# Altium PCB MXCHIP.PcbDoc
Units mm, origin at the board's own origin, x right, y up, seen from the top; angles counter-clockwise.
Board outline 38.8 x 27 mm, 2 copper layers (Top Layer, Bottom Layer); 16 components, 14 nets, 69 pads, 11 vias.
Unrouted connection lines stored in the file: 1.
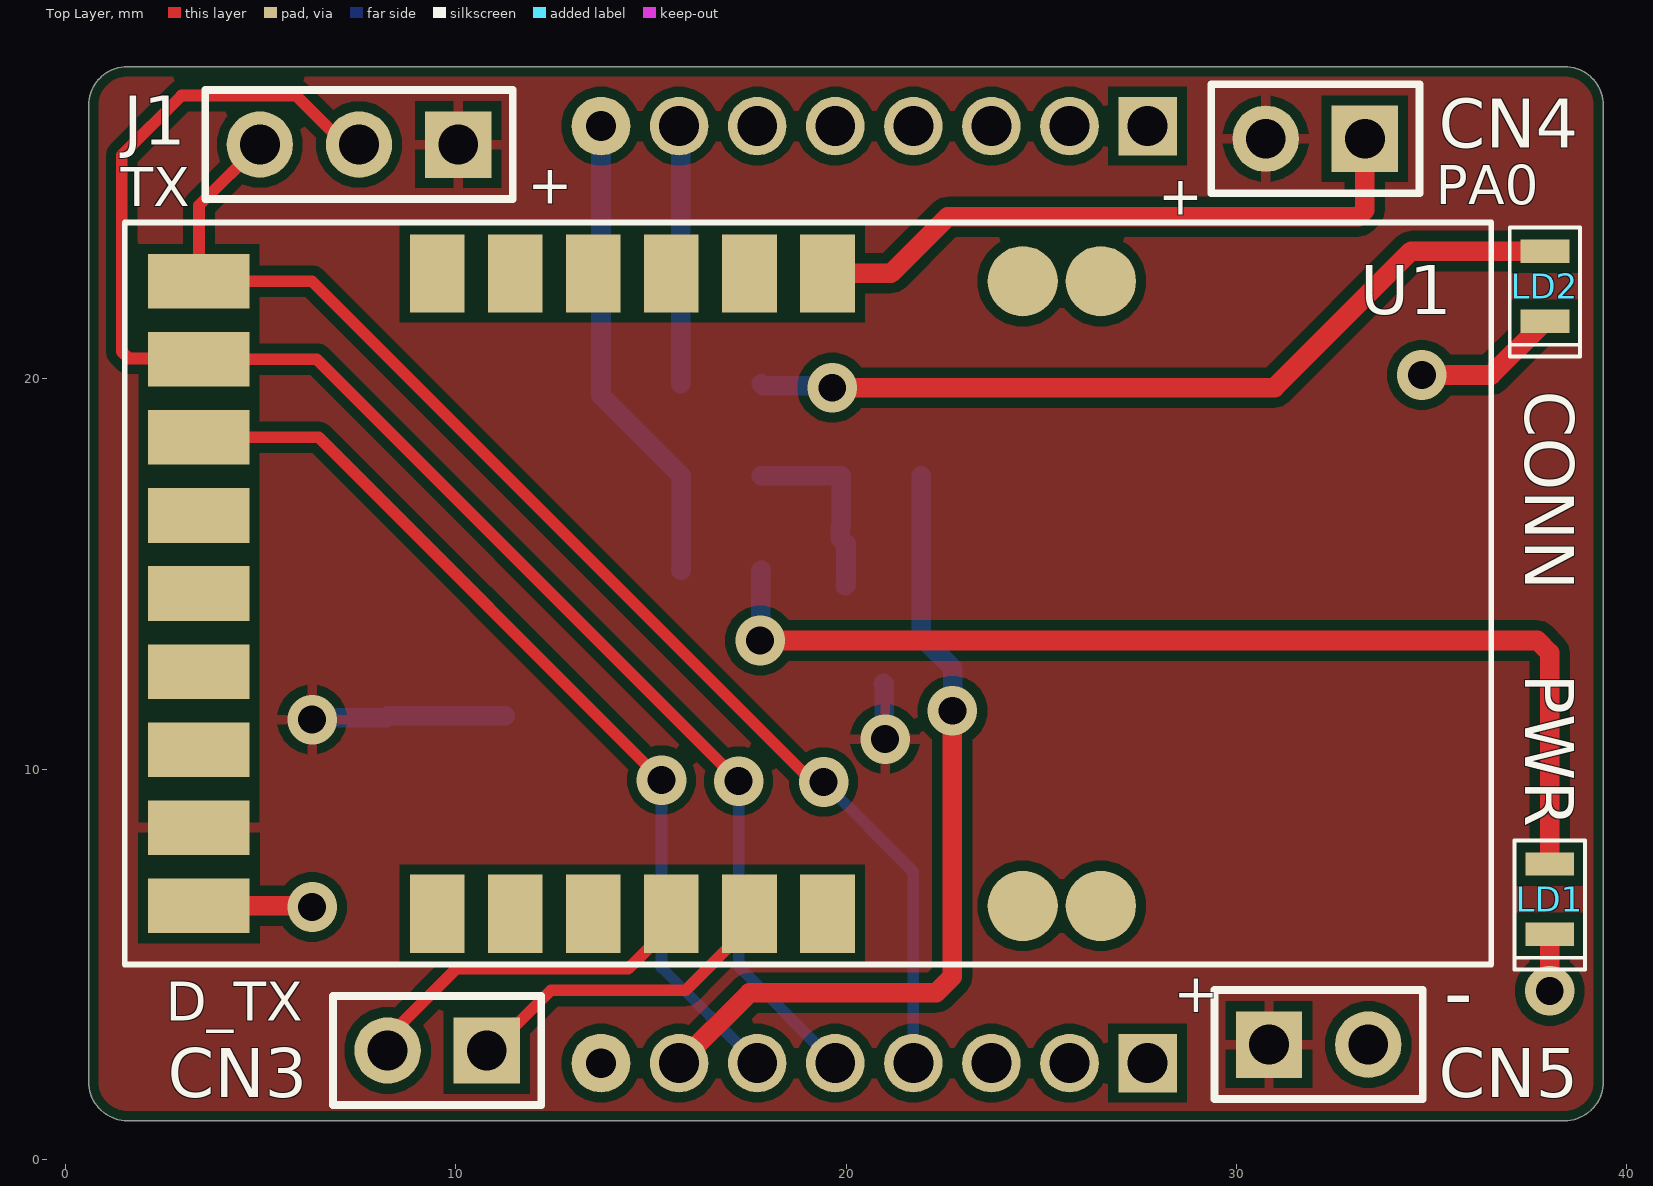
[diagram p0: Top Layer view]
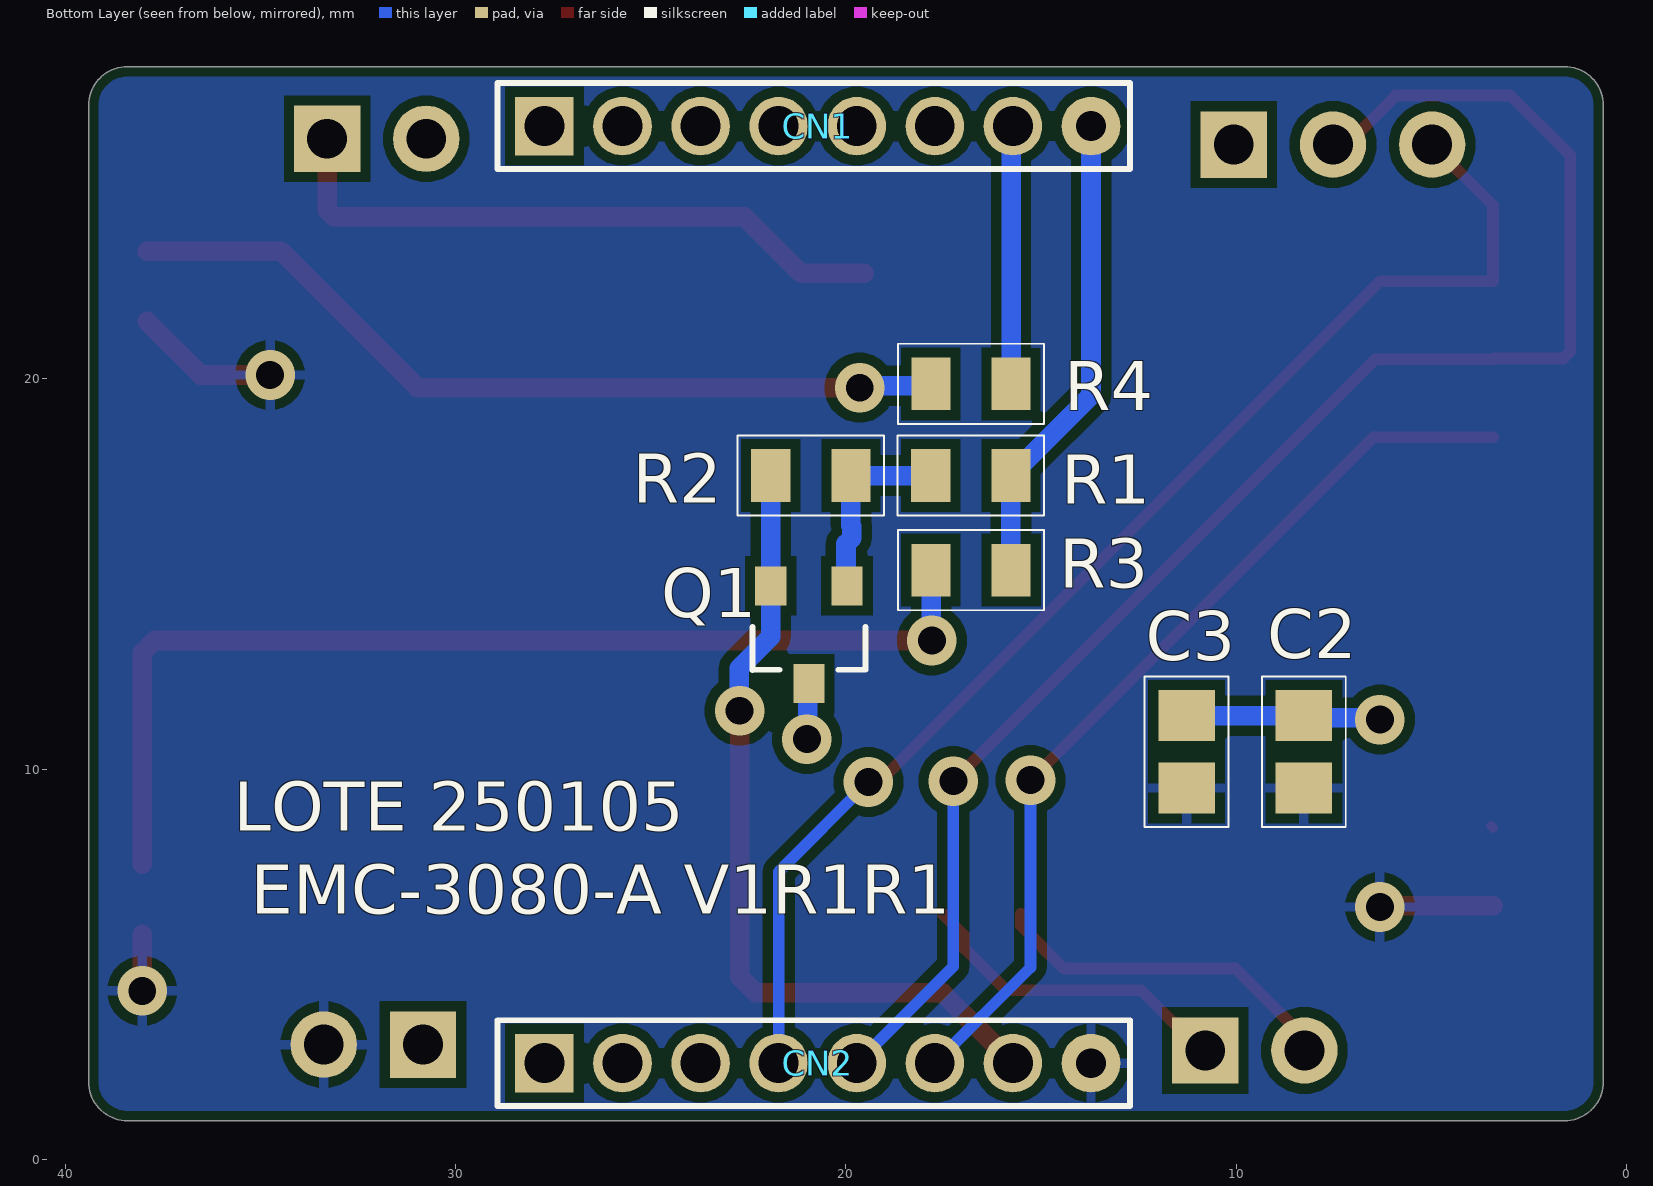
[diagram p1: Bottom Layer view, seen from below]
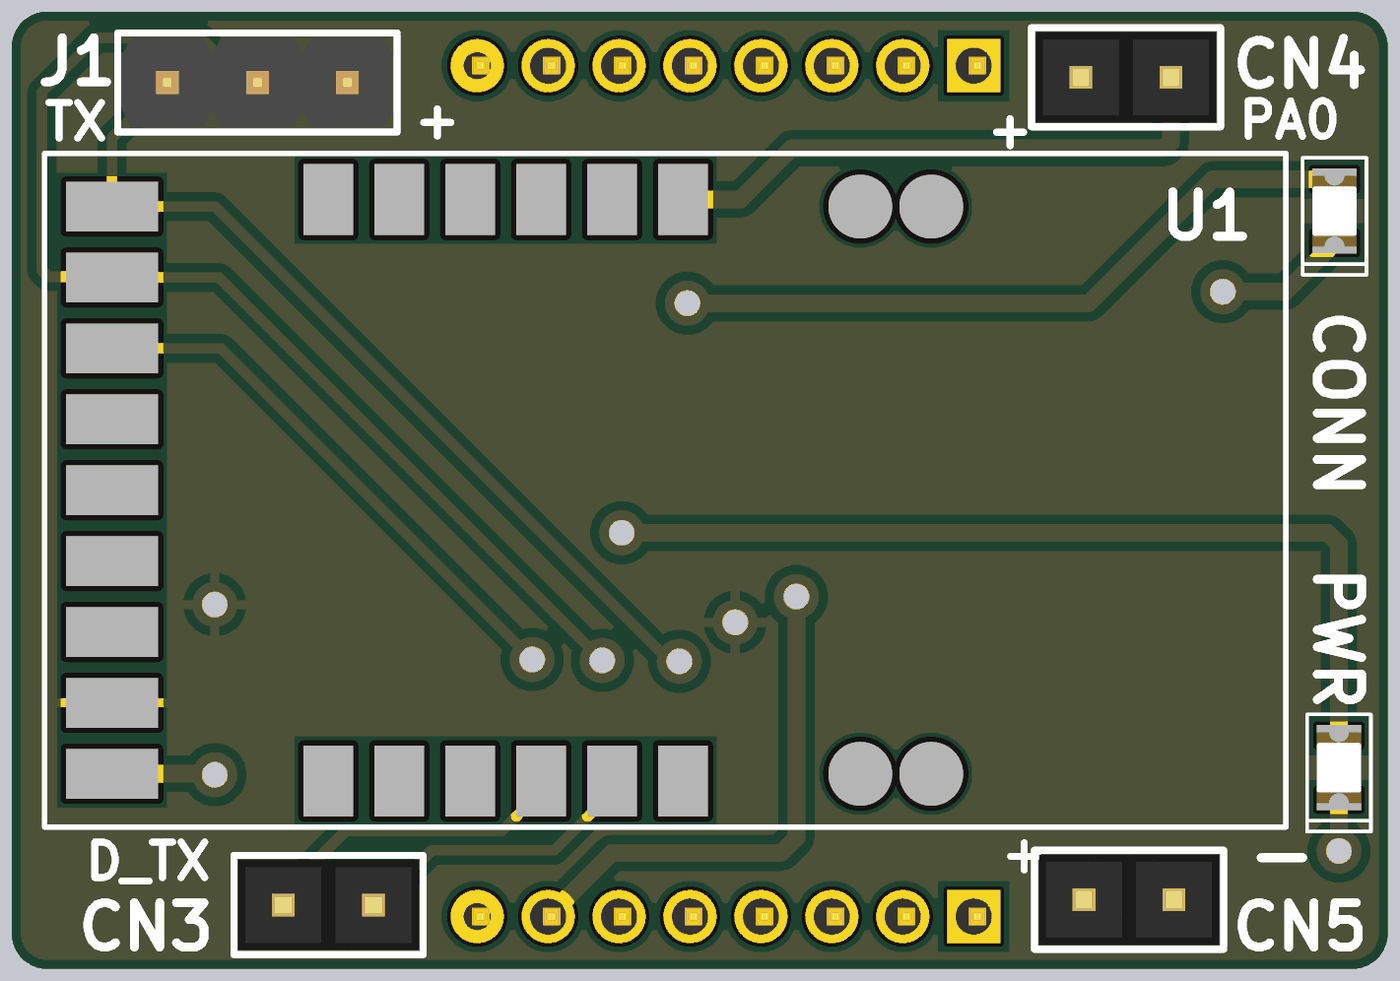
[diagram p2: 3D render of the assembled board from above, using the file's embedded part models]

## Layer stack, top to bottom
Top Solder: solder mask 0.0102, Solder Resist, Dk 3.5
Top Layer: signal copper 0.0356
Dielectric 1: dielectric 0.32, FR-4, Dk 4.8
Bottom Layer: signal copper 0.0356
Bottom Solder: solder mask 0.0102, Solder Resist, Dk 3.5

## Board outline
0.6,2 0.6,27 cw(c1.6,27) 1.6,28 38.4,28 cw(c38.4,27) 39.4,27 39.4,2 cw(c38.4,2) 38.4,1 1.6,1 cw(c1.6,2)

## Design rules (kind name [scope] priority, off if disabled: settings)
BoardOutlineClearance [All] p1: gap=0.25 ignorepadtopadclearanceinfootprint=FALSE
Clearance [All] p1: gap=0.254 ignorepadtopadclearanceinfootprint=FALSE except(0: Arc-Hole Track-Hole SMDPad-Hole THPad-Hole Via-Hole Fill-Hole Poly-Hole Region-Hole Text-Hole)
PolygonConnect [All] p1: connectstyle=Relief reliefconductorwidth=0.254 reliefentries=4 polygonreliefangle="90 Angle" airgapwidth=0.254
RoutingVias [All] p1: holewidth=0.711 width=1.27 viastyle="Through Hole" minholewidth=0.711 minwidth=1.27 maxholewidth=0.711 maxwidth=1.27
SilkToSilkClearance [All] p1: silktosilkclearance=0.15
SilkToSolderMaskClearance [IsPad] p1: minsilkscreentomaskgap=0.15 clearancetoexposedcopper=TRUE
SolderMaskExpansion [All] p1: expansion=0.102 istentingtop=FALSE
Width [All] p1: maxlimit=2 minlimit=0.2 preferedwidth=0.3
28 further rules are at their usual default settings.

## Components (designator, comment, footprint, x,y, rotation, side; value= is the part's Value field where it differs from the comment)
C2 "100nF" CAP_SM0805_YAGEOCC2_N 8.275,10.45 r270 bottom
C3 "4.7uF" CAP_SM0805_YAGEOCC2_N 11.275,10.45 r270 bottom
CN1 "DEALON DZ200R-11-08-39" "HEADER PIN 1X8 2mm" 20.725,26.475 r180 bottom locked
CN2 "DEALON DZ200R-11-08-39" "HEADER PIN 1X8 2mm" 20.725,2.475 r180 bottom locked
CN3 "Completar BOM con modelo 54101-T0600LF (o equivalente), es de 36 posiciones, este componente necesita cortar 2 por componente" "HEADER PIN 1X2" 9.53,2.8 r180 top
CN4 "Completar BOM con modelo 54101-T0600LF (o equivalente), es de 36 posiciones, este componente necesita cortar 2 por componente" "HEADER PIN 1X2" 32.02,26.15 r180 top
CN5 "Completar BOM con modelo 54101-T0600LF (o equivalente), es de 36 posiciones, este componente necesita cortar 2 por componente" "HEADER PIN 1X2" 32.105,2.95 r0 top
J1 "Completar BOM con modelo 54101-T0600LF (o equivalente), es de 36 posiciones, este componente necesita cortar 3 por componente" "HEADER PIN 1X3" 7.527,26.002 r180 top
LD1 "ERROR" "LED 0805" 38.025,6.675 r270 top
LD2 "RUN" "LED 0805" 37.9,22.375 r270 top
Q1 "DMG3401LSN-7" DMG3401LSN-7 20.95,13.3 r270 bottom
R1 "1K" RES_SM0805_YAGEORC_N 16.802,17.525 r180 bottom
R2 "1M" RES_SM0805_YAGEORC_N 20.9,17.525 r0 bottom
R3 "2K2" RES_SM0805_YAGEORC_N 16.798,15.1 r0 bottom
R4 "2K2" RES_SM0805_YAGEORC_N 16.798,19.875 r0 bottom
U1 "EMC3080-P" EMC3080-P 14.977,14.502 r270 top locked

## Footprints (in the part's own frame and the unit in brackets; to place one, negate y for a bottom-side part, rotate by r counter-clockwise, add the part's x,y. Pads: shape width x height; smd on the part's side, far side on the other; paste and mask are expansions set on the pad)
CAP_SM0805_YAGEOCC2_N [mm] "Capacitor, Yageo CC Class2, SM0805, IPC Medium Density"
  rect 1.3x1.45 smd: 1(-0.927,0) 2(0.927,0)
  silkscreen extent -1.92,-1.07 1.92,1.07, body extent -1.1,-0.72 1.1,0.72, height 1.45
DMG3401LSN-7 [mm]
  rect 1x0.8 smd: D(1.1,0) G(-1.4,0.975) S(-1.4,-0.975)
  silkscreen extent -0.35,-1.45 0.75,1.45, body extent -1.68,-1.55 1.32,1.55, height 1.45
EMC3080-P [mm]
  round 1.8 smd mask+0.15: 1(-8,11.55) 2(-8,9.55) 24(8,9.55) 25(8,11.55)
  rect 2x1.4 smd mask+0.15: 3(-8.2,4.55) 4(-8.2,2.55) 5(-8.2,0.55) 6(-8.2,-1.45) 7(-8.2,-3.45) 8(-8.2,-5.45) 18(8.2,-5.45) 19(8.2,-3.45) 20(8.2,-1.45) 21(8.2,0.55) 22(8.2,2.55) 23(8.2,4.55)
  rect 1.4x2.6 smd mask+0.15: 9(-8,-11.55) 10(-6,-11.55) 11(-4,-11.55) 12(-2,-11.55) 13(0,-11.55) 14(2,-11.55) 15(4,-11.55) 16(6,-11.55) 17(8,-11.55)
  silkscreen extent -9.5,-13.45 9.5,21.55
"HEADER PIN 1X2" [mm]
  rect 1.7x1.7 hole 1.02: 1(-1.27,0)
  round 1.7 hole 1.02: 2(1.27,0)
  silkscreen extent -2.67,-1.4 2.67,1.4, body extent -2.54,-1.27 2.54,1.27, height 8.49
"HEADER PIN 1X3" [mm]
  rect 1.7x1.7 hole 1.02: 1(-2.54,0)
  round 1.7 hole 1.02: 2(0,0) 3(2.54,0)
  silkscreen extent -3.94,-1.4 3.94,1.4, body extent -3.81,-1.27 3.81,1.27, height 8.57
"HEADER PIN 1X8 2mm" [mm]
  rect 1.5x1.5 hole 1.02: 1(-7,0)
  round 1.5 hole 1.02: 2(-5,0) 3(-3,0) 4(-1,0) 5(1,0) 6(3,0) 7(5,0)
  round 1.5 hole 0.762: 8(7,0)
  silkscreen extent -8.2,-1.1 8,1.1, body extent -8.1,-1 7.9,1, height 5
"LED 0805" [mm]
  rect 0.6x1.25 smd: A(-0.9,0) K(0.9,0)
  silkscreen extent -1.5,-0.9 1.8,0.9, body extent -1,-0.62 1,0.62, height 1
RES_SM0805_YAGEORC_N [mm] "Resistor, Yageo RC_L, SM0805, IPC Medium Density"
  rect 1x1.35 smd: 1(-1.027,0) 2(1.027,0)
  silkscreen extent -1.88,-1.02 1.88,1.02, body extent -1.05,-0.67 1.05,0.67, height 0.6

## Part data
C2: library part CC0805KRX7R8BB104, "CAP 100nF SM0805 X7R 25V YAGEO CC2", Manufacturer=Yageo, Package=0805, Supplier Part Number 1=644249, Tolerance (%)=10, Voltage Rating (Volts)=25, Category=Capacitor, ComponentLink1Description="Manufacturer Website", ComponentLink1URL=http://www.yageo.com, Manufacturer Part Number=CC0805KRX7R8BB104, Supplier 1=Farnell, Supplier 2=Digi-Key, Supplier Part Number 2=311-1141-1-ND
C3: library part CC0805KRX5R6BB475, "CAP 4.7uF SM0805 X5R 10V YAGEO CC2", Manufacturer=Yageo, Package=0805, Supplier Part Number 1=718671, Tolerance (%)=10, Category=Capacitor, ComponentLink1Description="Manufacturer Website", ComponentLink1URL=http://www.yageo.com, Datasheet=https://datasheet.lcsc.com/lcsc/2304140030_YAGEO-CC0805KRX5R6BB475_C605218.pdf, Manufacturer Part Number=CC0805KRX5R6BB475, Supplier 1=Farnell, Supplier 2=Digi-Key, Supplier Part Number 2=311-1374-1-ND, Voltage Rating (Volts)=10
CN1 CN2: "1 x 8 - true hole  2mm - Pb free", Manufacturer="Amphenol ICC", Manufacturer Part Number=DZ200R-11-08-39, Temperature Max=125, Temperature Min=-65, Category="Header pin", Datasheet=https://datasheet.lcsc.com/lcsc/2202082130_Amphenol-ICC-54101-T06-00_C213463.pdf
CN3 CN4 CN5: library part 54101-T0600LF-CUT-2, "1 x 2 - true hole  2.54mm - Pb free", Manufacturer="Amphenol ICC", Temperature Max=125, Temperature Min=-65, Category="Header pin", Datasheet=https://datasheet.lcsc.com/lcsc/2202082130_Amphenol-ICC-54101-T06-00_C213463.pdf, Equivalente=B-2100S02P-A110
J1: library part 54101-T0600LF-CUT-3, "1 x 3 - true hole  2.54mm - Pb free", Manufacturer="Amphenol ICC", Manufacturer Part Number=54101-T0600LF, Temperature Max=125, Temperature Min=-65, Category="Header pin", Datasheet=https://datasheet.lcsc.com/lcsc/2202082130_Amphenol-ICC-54101-T06-00_C213463.pdf
LD1: library part 17-21SURC/S530-A2/TR8, Manufacturer="Everlight Elec", Category=LED, Main supplier=LCSC, Manufacturer Part Number=17-21SURC/S530-A2/TR8
LD2: library part 17-21/BHC-XL2M2TY/3T, Manufacturer="Everlight Elec", Manufacturer Part Number=17-21/BHC-XL2M2TY, Temperature Max=85, Temperature Min=-40, Category=LED, Datasheet=https://datasheet.lcsc.com/lcsc/1809192317_Everlight-Elec-17-21-BHC-XL2M2TY-3T_C72035.pdf, Main supplier=LCSC
Q1: "P-CHANNEL ENHANCEMENT MODE MOSFET / RDS(ON) = 85mΩ @ VGS = -2.5V -> ID -2.7A / V(BR)DDS 30V", Manufacturer="Diodes Incorporated", Category="Transistor mosfet", Datasheet=https://www.digikey.com/es/products/detail/diodes-incorporated/DMG3401LSN-7/3720138?s=N4IgTCBcDaICIFkDiBmALABgIwBkDKAcgLQDsIAugL5A, Manufacturer Part Number=DMG3401LSN-7
R1: library part RC0805FR-071KL, "RES 1K SM0805 YAGEO RC_L", Manufacturer=Yageo, Package=0805, Power (Watts)=0.125, Resistance (Ohms)=1000, Supplier Part Number 1=9237496, Tolerance (%)=1, Category=Resistor, ComponentLink1Description="Manufacturer Website", ComponentLink1URL=http://www.yageo.com, Datasheet=https://www.yageo.com/upload/media/product/app/datasheet/rchip/pyu-rc_group_51_rohs_l.pdf, Manufacturer Part Number=RC0805FR-071KL, Supplier 1=Farnell, Supplier 2=Digi-Key, Supplier Part Number 2=311-1.00KCRCT-ND
R2: library part RC0805FR-071ML, "RES 1M SM0805 YAGEO RC_L", Manufacturer=Yageo, Package=0805, Power (Watts)=0.125, Resistance (Ohms)=1000000, Supplier Part Number 1=9237992, Tolerance (%)=1, Category=Resistor, ComponentLink1Description="Manufacturer Website", ComponentLink1URL=http://www.yageo.com, Datasheet=https://www.yageo.com/upload/media/product/productsearch/datasheet/rchip/PYu-RC_Group_51_RoHS_L_12.pdf, Manufacturer Part Number=RC0805FR-071ML, Supplier 1=Farnell, Supplier 2=Digi-Key, Supplier Part Number 2=311-1.00MCRCT-ND
R3 R4: library part RC0805FR-072K2L, "RES 2K2 SM0805 YAGEO RC_L", Manufacturer=Yageo, Package=0805, Power (Watts)=0.125, Resistance (Ohms)=2200, Supplier Part Number 1=9237534, Tolerance (%)=1, Category=Resistor, ComponentLink1Description="Manufacturer Website", ComponentLink1URL=http://www.yageo.com, Manufacturer Part Number=RC0805FR-072K2L, Supplier 1=Farnell, Supplier 2=Digi-Key, Supplier Part Number 2=311-2.20KCRCT-ND
U1: "Solamente es el zocalo donde va montado el chip, por eso no tiene modelo 3D", Manufacturer=MXCHIP, Category="BLE Module", Datasheet=https://files.seeedstudio.com/products/113990975/EMC3080EN.pdf, Manufacturer Part Number=EMC3080-P

## Via types
v1: diameter 1.27, hole 0.711, Top Layer to Bottom Layer, tented both sides, 11 vias

## Nets (pads, with @x,y where several pads share a name; then routed paths per layer and width w, separated by ;. In a path a pad name is that pad's centre, name@x,y a point inside that pad or via, vN(x,y) a via of type N, cw(c..) or ccw(c..) an arc to the next point about the centre after c; other vN are vias at no path point)
DBG_RX: CN3.1 U1.22 | length 8.4
  Top Layer w0.3: CN3.1 11.5,3.5 11.6,3.5 12.444,4.344 15.895,4.344 16.449,4.898 16.977,5.426 16.977,5.752 U1.22
DBG_TX: CN3.2 U1.21 | length 9.1
  Top Layer w0.3: CN3.2 8.26,3.135 10.023,4.898 14.423,4.898 15.527,6.002 U1.21
DVDD: CN2.7 Q1.S R2.2 | length 21.1
  Top Layer w0.5: CN2.7 17.525,4.275 22.307,4.275 22.725,4.693 v1(22.725,11.5)
  Bottom Layer w0.5: R2.2 21.927,14.702 Q1.S 21.925,13.4 22.74,12.585 22.74,11.515 v1(22.725,11.5)
DVDD1: C2.1 C3.1 CN4.2 CN5.1 J1.1 Q1.D U1.16 | length 6.5
  Top Layer w0.254: U1.16 U1.16@3.475,8.55
  Bottom Layer w0.5: v1(6.325,11.275) 6.376,11.326 8.224,11.326 C2.1 C3.1 ; Q1.D 20.975,12.175 20.975,10.8 v1(21,10.775)
GND: C2.2 C3.2 CN2.8 CN5.2 LD1.K LD2.K U1.17 | length 8.1
  Top Layer w0.5: U1.17 6.298,6.502 v1(6.325,6.475) ; v1(34.75,20.1) 36.525,20.1 LD2.K ; v1(38.025,4.325) LD1.K
MXC_CONNECT: CN1.7 R4.1 | length 6.6
  Bottom Layer w0.3: CN1.7 CN1.7@15.771,26.429
  Bottom Layer w0.5: R4.1 CN1.7@15.771,26.429
MXC_ENABLE: CN2.6 U1.11 | length 23.7
  Top Layer w0.3: U1.11 6.498,18.502 v1(15.275,9.725)
  Bottom Layer w0.3: v1(15.275,9.725) 15.275,4.925 CN2.6
MXC_ON: CN1.8 R1.2 R3.1 | length 12.2
  Bottom Layer w0.5: CN1.8 13.725,19.575 R1.2 15.775,15.104 R3.1
MXC_PA0: CN4.1 U1.3 | length 16.3
  Top Layer w0.5: U1.3 21.152,22.702 22.6,24.15 33.114,24.15 33.29,24.326 CN4.1
MXC_UART_RX: CN2.5 J1.2 U1.10 | length 40.9
  Top Layer w0.3: J1.2 7.179,26.002 5.925,27.256 2.981,27.256 1.45,25.725 1.45,20.701 1.626,20.525 3.404,20.525 U1.10 6.448,20.502 v1(17.25,9.7)
  Bottom Layer w0.3: v1(17.25,9.7) 17.25,4.95 CN2.5
MXC_UART_TX: CN2.4 J1.3 U1.9 | length 33.6
  Top Layer w0.3: J1.3 3.427,24.442 U1.9 6.323,22.502 19.15,9.675 v1(19.425,9.675) ; CN2.4 CN2.4@21.75,2.5
  Bottom Layer w0.3: v1(19.425,9.675) 21.725,7.375 CN2.4
NetLD1_A: LD1.A R3.2 | length 27.6
  Top Layer w0.5: v1(17.8,13.3) 37.707,13.3 38.025,12.982 LD1.A
  Bottom Layer w0.5: v1(17.8,13.3) 17.813,13.313 17.813,15.088 R3.2
NetLD2_A: LD2.A R4.2 | length 21.6
  Top Layer w0.5: v1(19.65,19.775) 30.975,19.775 34.475,23.275 LD2.A
  Bottom Layer w0.5: R4.2 17.875,19.825 19.6,19.825 v1(19.65,19.775)
NetQ1_G: Q1.G R1.1 R2.1 | length 5
  Bottom Layer w0.5: R1.1 R2.1 19.873,16.248 19.85,16.225 19.85,15.925 20,15.775 20,14.725 Q1.G
pads on no net: CN1.1 CN1.2 CN1.3 CN1.4 CN1.5 CN1.6 CN2.1 CN2.2 CN2.3 U1.1 U1.2 U1.4 U1.5 U1.6 U1.7 U1.8 U1.12 U1.13 U1.14 U1.15 U1.18 U1.19 U1.20 U1.23 U1.24 U1.25

## Polygon pours and split planes (outlines as drawn)
GND on Bottom Layer "GND_L02_P000" (solid, pour order 0): 0.6,1 0.6,28 39.4,28 39.4,1
DVDD1 on Top Layer "DVDD1_L01_P001" (solid, pour order 1): 0.6,1 0.6,28 39.4,28 39.4,1

## Silkscreen, mask and mechanical layers (free items; w line width, h text height)
Top Overlay:
  text "+" at 11.85,24.483 h1
  text "PA0" at 35.1,24.475 h1
  text "TX" at 1.425,24.425 h1
  text "+" at 28,24.208 h1
  text "CONN" at 37.4,19.7 h1.25 r270
  text "PWR" at 37.4,12.45 h1.25 r270
  text "+" at 28.4,3.783 h1
  text "D_TX" at 2.575,3.567 h1
  text "-" at 35.304,3.542 h1.52
Bottom Overlay:
  text "LOTE 250105" at 35.675,8.425 h1.25
  text "EMC-3080-A V1R1R1" at 35.25,6.3 h1.25
Bottom Courtyard:
  lines w0.1: 0.6,2 ccw(c1.6,2) 1.6,1 38.4,1 ccw(c38.4,2) 39.4,2 39.4,27 ccw(c38.4,27) 38.4,28 1.6,28 ccw(c1.6,27) 0.6,27 0.6,2 ; 0.985,2.385 ccw(c1.985,2.385) 1.985,1.385 38.015,1.385 ccw(c38.015,2.385) 39.015,2.385 39.015,26.615 ccw(c38.015,26.615) 38.015,27.615 1.985,27.615 ccw(c1.985,26.615) 0.985,26.615 0.985,2.385

## Dimensions
39.4,28 to 39.4,1 on Mechanical 1
0.6,28 to 39.4,28 on Mechanical 1